# Altium PCB PCB5.pcbdoc
Units mil, origin at the board's own origin, x right, y up, seen from the top; angles counter-clockwise.
Board outline 1301.57 x 1593.8 mil, 2 copper layers (Top Layer, Bottom Layer); 13 components, 7 nets, 64 pads, 11 vias.
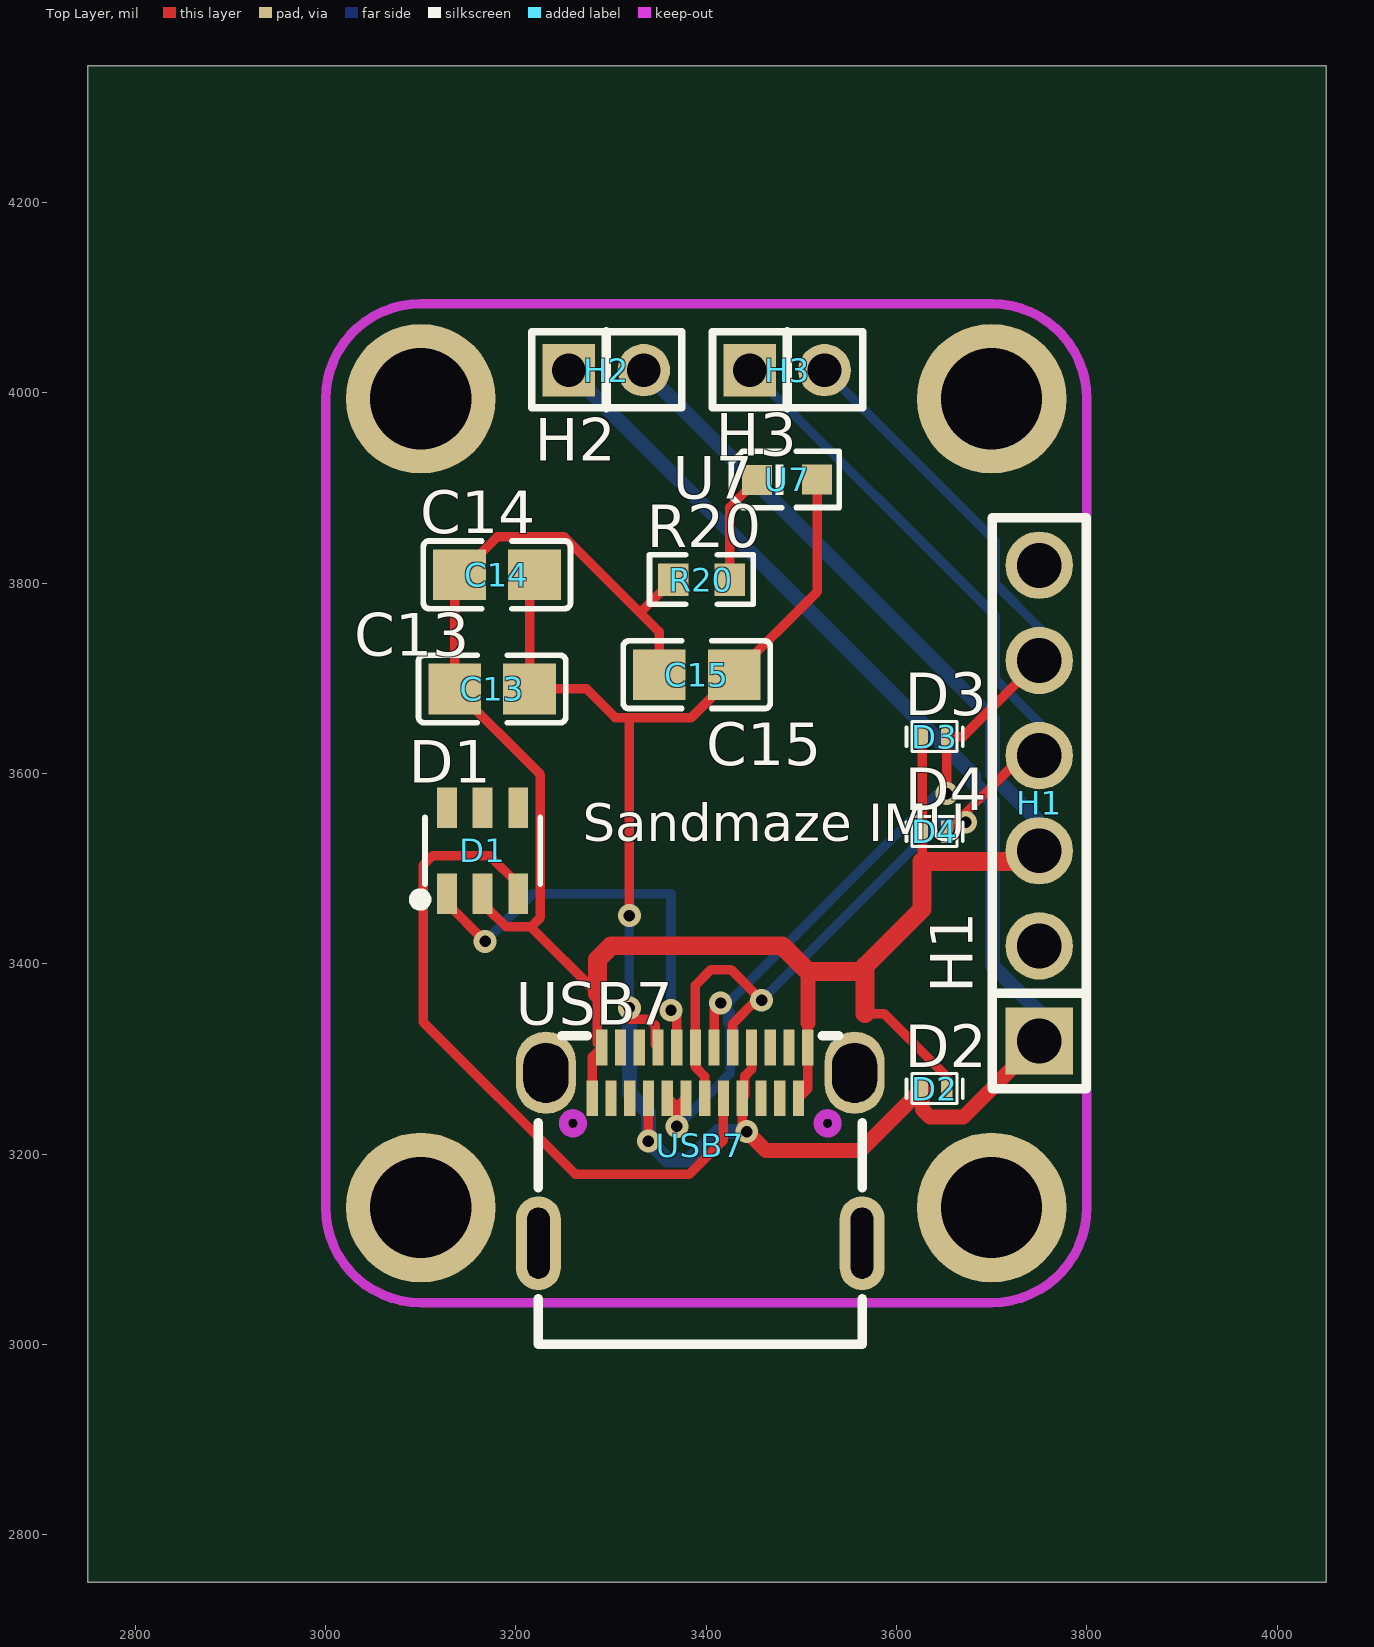
[diagram p0: Top Layer view]
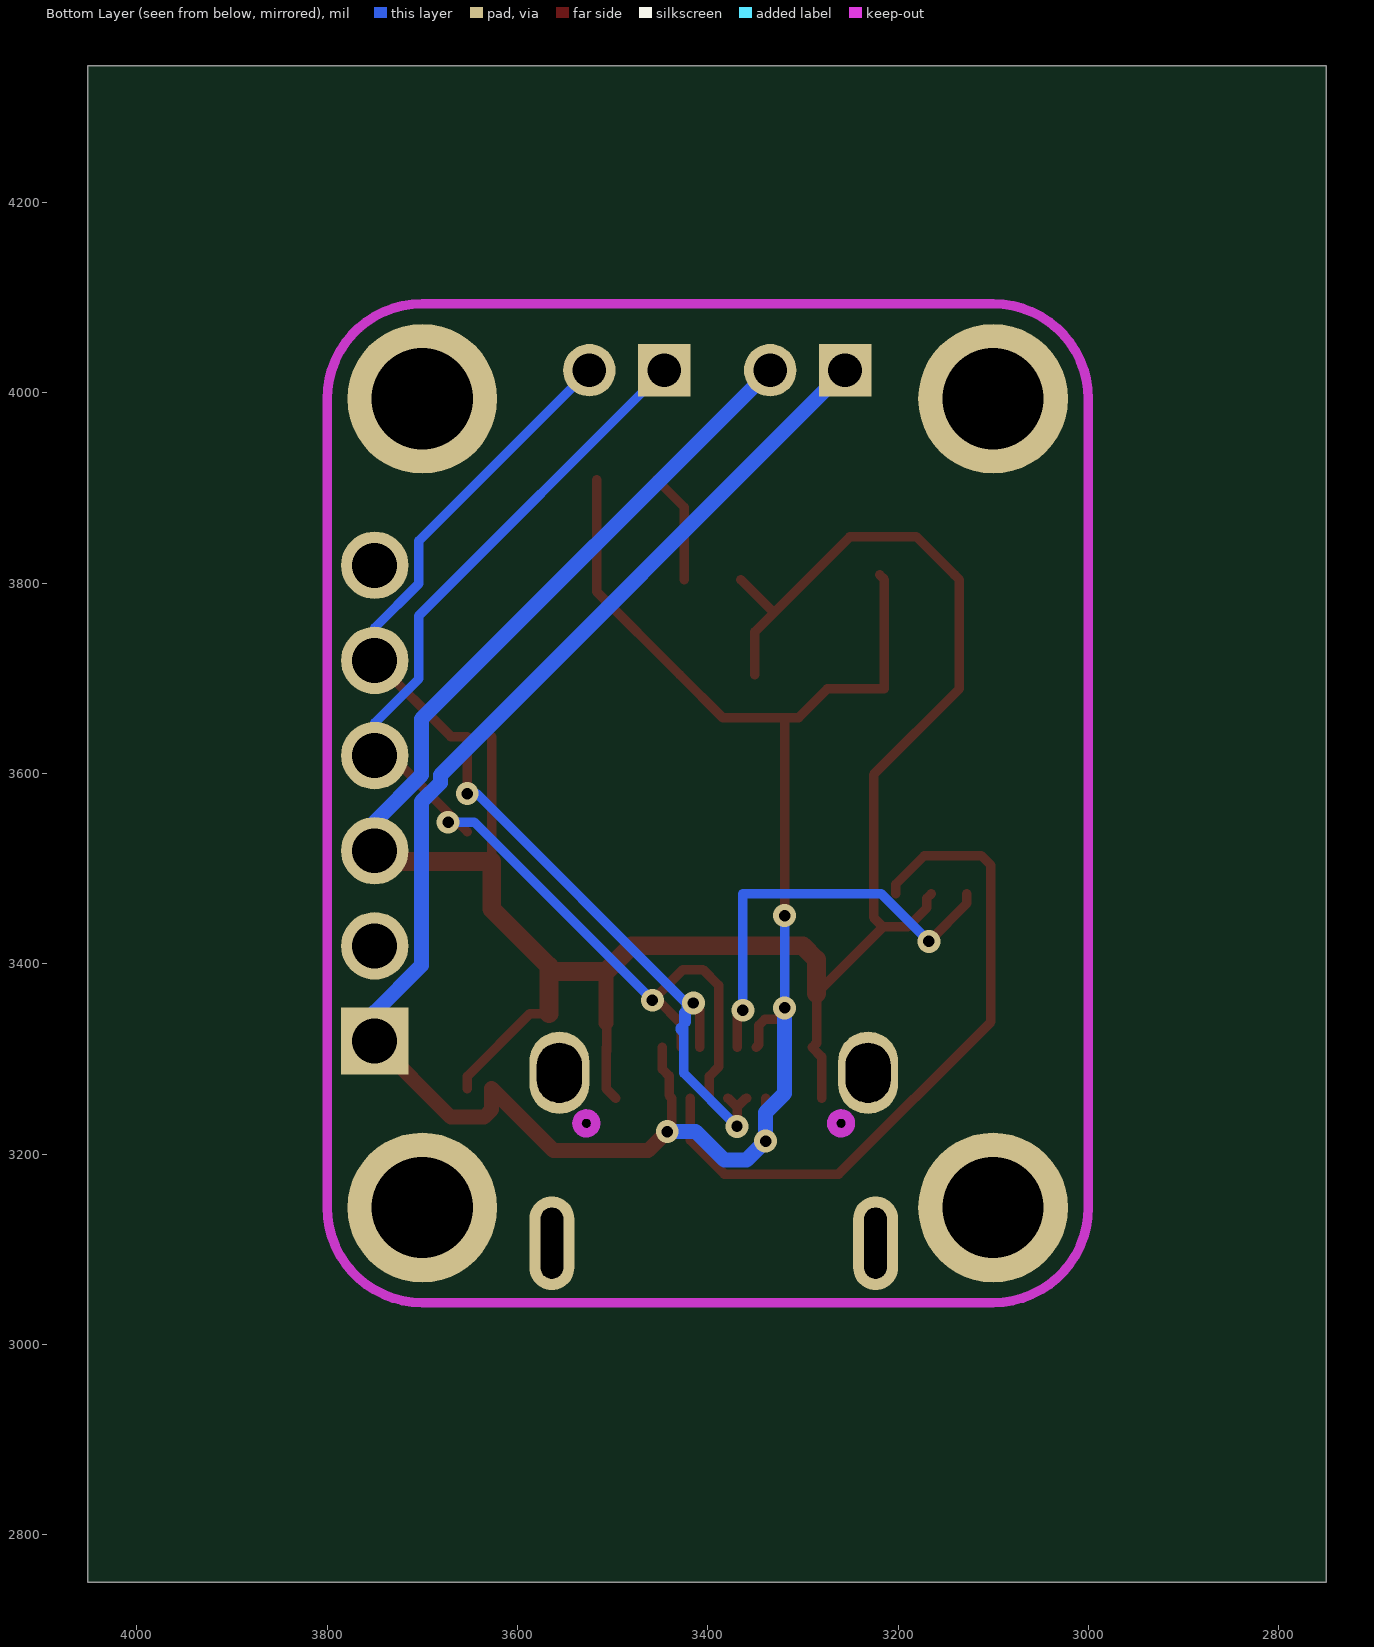
[diagram p1: Bottom Layer view, seen from below]

## Layer stack, top to bottom
Top Layer: signal copper (thickness not stored)
Dielectric: dielectric 12.6, FR-4, Dk 4.8
Bottom Layer: signal copper (thickness not stored)

## Board outline
4051.57,2750 2750,2750 2750,4343.8 4051.57,4343.8

## Design rules (kind name [scope] priority, off if disabled: settings)
BoardOutlineClearance copperThickness1oz [All] p0: genericclearance=10 ignorepadtopadclearanceinfootprint=FALSE except(0: Arc-SplitContinuation Track-SplitContinuation SMDPad-SplitContinuation THPad-SplitContinuation Via-SplitContinuation Fill-SplitContinuation Poly-SplitContinuation Region-SplitContinuation Text-SplitContinuation; 6: Track-CutoutEdge SMDPad-CutoutEdge THPad-CutoutEdge Via-CutoutEdge Region-CutoutEdge; 11.8: Track-OutlineEdge SMDPad-OutlineEdge THPad-OutlineEdge Via-OutlineEdge Fill-OutlineEdge Region-OutlineEdge Poly-OutlineEdge Text-OutlineEdge Fill-CutoutEdge)
BoardOutlineClearance copperThickness2oz [All] p0: genericclearance=10 ignorepadtopadclearanceinfootprint=FALSE except(0: Arc-SplitContinuation Track-SplitContinuation SMDPad-SplitContinuation THPad-SplitContinuation Via-SplitContinuation Fill-SplitContinuation Poly-SplitContinuation Region-SplitContinuation Text-SplitContinuation; 6: Track-CutoutEdge SMDPad-CutoutEdge THPad-CutoutEdge Via-CutoutEdge Region-CutoutEdge; 11.8: Track-OutlineEdge SMDPad-OutlineEdge THPad-OutlineEdge Via-OutlineEdge Fill-OutlineEdge Region-OutlineEdge Poly-OutlineEdge Text-OutlineEdge Fill-CutoutEdge)
Clearance copperThickness1oz [(InNet('+5V') OR InNet('GND') OR InNet('CC1') OR InNet('CC2') OR InNet('IMU_SCL') OR InNet('IMU_SDA') OR InNet('$1N645'))] p1: gap=7 ignorepadtopadclearanceinfootprint=FALSE except(4: Track-Track; 6: Track-SMDPad SMDPad-SMDPad Track-THPad SMDPad-THPad THPad-THPad Track-Via SMDPad-Via THPad-Via Via-Via SMDPad-Fill THPad-Fill Via-Fill Fill-Fill Track-Region SMDPad-Region THPad-Region Via-Region Region-Region Track-Poly SMDPad-Poly THPad-Poly Via-Poly Fill-Poly Region-Poly Poly-Poly Track-Text SMDPad-Text THPad-Text Via-Text Fill-Text Region-Text Poly-Text Text-Text; 6.9: Track-Hole SMDPad-Hole THPad-Hole Via-Hole Fill-Hole Region-Hole Poly-Hole Text-Hole Sheet-Hole; 11.8: Track-Fill Fill-Region Track-Sheet SMDPad-Sheet THPad-Sheet Via-Sheet Fill-Sheet Region-Sheet Poly-Sheet Text-Sheet)
Clearance copperThickness2oz [All] p1: gap=7 ignorepadtopadclearanceinfootprint=FALSE except(6: Track-SMDPad SMDPad-SMDPad Track-THPad SMDPad-THPad THPad-THPad Track-Via SMDPad-Via THPad-Via Via-Via SMDPad-Fill THPad-Fill Via-Fill Fill-Fill Track-Region SMDPad-Region THPad-Region Via-Region Region-Region Track-Poly SMDPad-Poly THPad-Poly Via-Poly Fill-Poly Region-Poly Poly-Poly Track-Text SMDPad-Text THPad-Text Via-Text Fill-Text Region-Text Poly-Text Text-Text; 6.9: Track-Hole SMDPad-Hole THPad-Hole Via-Hole Fill-Hole Region-Hole Poly-Hole Text-Hole Sheet-Hole; 8: Track-Track; 11.8: Track-Fill Fill-Region Track-Sheet SMDPad-Sheet THPad-Sheet Via-Sheet Fill-Sheet Region-Sheet Poly-Sheet Text-Sheet)
DiffPairsRouting differentialPair [All] p1: maxuncoupledlength=10 minlimit=6 maxlimit=6 mostfreqgap=6 toplayer_minwidth=5 toplayer_prefwidth=10 toplayer_maxwidth=100 bottomlayer_minwidth=5 bottomlayer_prefwidth=10 bottomlayer_maxwidth=100
PasteMaskExpansion pasteMaskExpansion [All] p1: expansion=0
PlaneConnect innerPlane [All] p1: planeconnectstyle=Relief reliefexpansion=20 reliefentries=4 reliefconductorwidth=10 reliefairgap=10
PolygonConnect copperRegion [All] p1: connectstyle=Relief reliefentries=4 reliefconductorwidth=10 polygonreliefangle="90 Angle" airgapwidth=10
RoutingVias viaSize [All] p1: viastyle="Through Hole" holewidth=12.0078 minholewidth=11.811 maxholewidth=248.0314 width=24.0158 minwidth=19.685 maxwidth=393.7008
SolderMaskExpansion solderMaskExpansion [All] p1: useseparateexpansions=TRUE expansion=2 expansionbottom=2
Width copperThickness1oz [All] p1: maxlimit=100 minlimit=5 preferedwidth=10
Width copperThickness2oz [All] p1: maxlimit=100 minlimit=8 preferedwidth=10

## Components (designator, comment, footprint, x,y, rotation, side; value= is the part's Value field where it differs from the comment)
C13 "CL21B104KBCNNNC" C0805 3175,3688.8 r0 top
C14 "CL21B104KBCNNNC" C0805 3180,3808.8 r0 top
C15 "CL21B104KBCNNNC" C0805 3390,3703.8 r0 top
D1 "SRV05-4_C558418" SOT-23-6_L2.9-W1.6-P0.95-LS2.8-BL 3165,3518.8 r0 top
D2 "H5VL10B" SOD-882_L1.0-W0.6-BI 3640,3268.8 r0 top
D3 "H5VL10B" SOD-882_L1.0-W0.6-BI 3640,3638.8 r0 top
D4 "H5VL10B" SOD-882_L1.0-W0.6-BI 3640,3538.8 r0 top
H1 "2.54-1x6P直针" HDR-TH_6P-P2.54-V-M-1 3750,3568.8 r90 top
H2 "PZ200V-11-02P" HDR-TH_2P-P2.00-V-M 3295,4023.8 r0 top
H3 "PZ200V-11-02P" HDR-TH_2P-P2.00-V-M 3485,4023.8 r0 top
R20 "RC0603FR-07470RL" R0603 3395,3803.8 r0 top
U7 "PSC-1608U52GC-G4" LED0603-RD_GREEN 3485,3908.8 r0 top
USB7 "TYPEC-324G-BCP24" USB-C-SMD_TYPEC-324G-BCP24 3393.7,3209.16 r0 top locked

## Footprints (in the part's own frame and the unit in brackets; to place one, negate y for a bottom-side part, rotate by r counter-clockwise, add the part's x,y. Pads: shape width x height; smd on the part's side, far side on the other; paste and mask are expansions set on the pad)
C0805 [mm]
  rect 1.41x1.35 smd: 1(-1,0) 2(1,0)
  silkscreen extent -1.96,-0.9 1.96,0.9
HDR-TH_2P-P2.00-V-M [mm]
  rect 1.4x1.4 hole 0.9: 1(-1,0)
  round 1.4 hole 0.9: 2(1,0)
  silkscreen extent -1.99,-1 2.02,1.03
HDR-TH_6P-P2.54-V-M-1 [mm]
  rect 1.8x1.8 hole 1.2: 1(-6.35,0)
  round 1.8 hole 1.2: 2(-3.81,0) 3(-1.27,0) 4(1.27,0) 5(3.81,0) 6(6.35,0)
  silkscreen extent -7.62,-1.25 7.62,1.25
LED0603-RD_GREEN [mm]
  rect 0.8x0.8 smd: 1(-0.799,-0.003) 2(0.799,0.003)
  silkscreen extent -1.49,-0.75 1.39,0.76
R0603 [mil]
  rect 31.75x34.02 smd: 1(-29.66,0) 2(29.66,0)
  silkscreen extent -55,-26 55,26
SOD-882_L1.0-W0.6-BI [mm]
  rect 0.3x0.6 smd: 1(-0.325,0) 2(0.325,0)
  silkscreen extent -0.75,-0.4 0.75,0.4
SOT-23-6_L2.9-W1.6-P0.95-LS2.8-BL [mil]
  rect 20.95x42.2 smd: 1(-37.4,-45.24) 2(0,-45.24) 3(37.4,-45.24) 4(37.4,45.24) 5(0,45.24) 6(-37.4,45.24)
  silkscreen extent -72,-57 61,35
USB-C-SMD_TYPEC-324G-BCP24 [mm]
  oval 1.6x2.2 hole 1.2 slot 1.6 at 90 deg: 1(-4.12,1.937) 2(4.12,1.937)
  oval 1.2x2.5 hole 0.6 slot 1.9 at 90 deg: 3(-4.32,-2.613) 4(4.32,-2.613)
  rect 0.3x0.95 smd: A1(-2.63,2.613) A2(-2.13,2.613) A3(-1.63,2.613) A4(-1.13,2.613) A5(-0.63,2.613) A6(-0.13,2.613) A7(0.37,2.613) A8(0.87,2.613) A9(1.37,2.613) A10(1.87,2.613) A11(2.37,2.613) A12(2.87,2.613) B1(2.62,1.262) B2(2.12,1.262) B3(1.62,1.262) B4(1.12,1.262) B5(0.62,1.262) B6(0.12,1.262) B7(-0.38,1.262) B8(-0.88,1.262) B9(-1.38,1.262) B10(-1.88,1.262) B11(-2.38,1.262) B12(-2.88,1.262)
  Board Outline Layer circle w0.005: c3.4,0.587 r0.25
  Board Outline Layer circle w0.005: c-3.4,0.587 r0.25
  Board Outline Layer circle w0.254: c3.4,0.587 r0.25
  Board Outline Layer circle w0.254: c-3.4,0.587 r0.25
  Multi-Layer board cut-out: 3.65,0.587 3.615,0.711 3.524,0.801 3.4,0.834 3.276,0.801 3.185,0.711 3.15,0.587 3.15,0.587 3.185,0.464 3.276,0.374 3.4,0.341 3.524,0.374 3.615,0.464 3.65,0.587
  Multi-Layer board cut-out: -3.15,0.587 -3.185,0.711 -3.276,0.801 -3.4,0.834 -3.524,0.801 -3.615,0.711 -3.65,0.587 -3.65,0.587 -3.615,0.464 -3.524,0.374 -3.4,0.341 -3.276,0.374 -3.185,0.464 -3.15,0.587
  silkscreen extent -4.32,-5.31 4.32,2.92

## Free pads (board coordinates)
  round 157.48 hole 106.3 unplated: 1(3100,3143.8) 1(3100,3993.8) 1(3700,3143.8) 1(3700,3993.8)

## Via types
v1: diameter 24.02, hole 12.01, Top Layer to Bottom Layer, 11 vias

## Nets (pads, with @x,y where several pads share a name; then routed paths per layer and width w, separated by ;. In a path a pad name is that pad's centre, name@x,y a point inside that pad or via, vN(x,y) a via of type N, cw(c..) or ccw(c..) an arc to the next point about the centre after c; other vN are vias at no path point)
$1N645: R20.2 U7.1 | length 116.8
  Top Layer w10: R20.2 3424.66,3879.8 U7.1
+5V: C13.2 C14.2 C15.2 D2.1 H1.1 H2.1 U7.2 USB7.A4 USB7.A9 USB7.B4 USB7.B9 | length 2703.7
  Top Layer w10: C14.2 3214.37,3803.8 C13.2 3274.37,3688.8 3304.37,3658.8 3320,3658.8 ; v1(3319.22,3353.65) 3319.22,3342.01 3319.54,3341.7 3339.99,3341.7 3346.42,3335.26 3346.42,3314.81 USB7.A4 ; v1(3319.22,3450.57) 3319.22,3658.02 3320,3658.8 ; v1(3339.22,3213.65) USB7.B9@3339.22,3258.71 ; v1(3442.59,3223.65) 3437.8,3228.45 USB7.B4 3440.59,3261.65 3440.59,3282.11 3447.64,3289.16 USB7.A9 ; U7.2 3516.47,3790.91 C15.2 3384.37,3658.8 3320,3658.8
  Top Layer w15.75: v1(3442.59,3223.65) 3462.59,3203.65 3562.06,3203.65 D2.1 3627.2,3246.6 3635,3238.8 3670,3238.8 H1.1
  Bottom Layer w10: v1(3319.22,3353.65) v1(3319.22,3450.57)
  Bottom Layer w15.75: H2.1 3680.95,3598.49 3680.95,3590.2 3700.71,3570.43 3700.71,3398.38 3750,3349.09 H1.1 ; v1(3319.22,3353.65) 3319.22,3263.65 3339.22,3243.65 v1(3339.22,3213.65) 3359.22,3193.65 3382.59,3193.65 3412.59,3223.65 v1(3442.59,3223.65)
CC1: D1.1 USB7.A5 | length 447
  Top Layer w10: D1.1 3127.6,3463.56 v1(3167.6,3423.56) ; v1(3362.98,3351.22) 3368.9,3345.3 USB7.A5
  Bottom Layer w10: v1(3167.6,3423.56) 3217.84,3473.8 3362.98,3473.8 v1(3362.98,3351.22)
CC2: D1.3 USB7.B5 | length 732.3
  Top Layer w10: D1.3 3202.4,3483.56 3172.4,3513.56 3112.4,3513.56 3102.4,3503.56 3102.4,3338.86 3262.4,3178.86 3382.4,3178.86 3418.11,3214.57 USB7.B5
GND: C13.1 C14.1 C15.1 D1.2 D2.2 D3.1 D4.1 H1.3 H2.2 R20.1 USB7.A1 USB7.A12 USB7.B1 USB7.B12 | length 2787.4
  Top Layer w10: D1.2 3169.76,3468.8 3169.76,3458.8 3189.76,3438.8 3215.63,3438.8 ; USB7.B12 3280.32,3302.17 USB7.A1 3285.63,3316.54 3285.63,3368.8 3215.63,3438.8 ; 3330.63,3769.09 R20.1 ; C15.1 3350.63,3748.8 3250.63,3848.8 3180.63,3848.8 C14.1 3135.63,3803.8 C13.1 3225.63,3598.8 3225.63,3448.8 3215.63,3438.8 ; USB7.B1 3506.85,3268.86 USB7.A12@3506.85,3307.58 ; USB7.A12 USB7.A12@3506.85,3307.58 ; 3506.85,3337.58 3506.25,3337.58 3506.25,3308.18 USB7.A12@3506.85,3307.58 ; 3566.85,3347.58 3586.85,3347.58 3652.8,3281.64 D2.2 ; 3626.85,3507.58 3626.85,3538.45 D4.1 D3.1
  Top Layer w15.75: 3506.85,3337.58 3506.85,3391.95
  Top Layer w19.68: 3285.63,3368.8 3285.63,3404.43 3300,3418.8 3480,3418.8 3506.85,3391.95 3561.22,3391.95 3566.85,3397.58 ; 3566.85,3347.58 3566.85,3397.58 ; H1.3 3738.78,3507.58 3626.85,3507.58 3626.85,3457.58 3566.85,3397.58
  Bottom Layer w15.75: H2.2 3700.71,3657.46 3700.71,3598.38 3750,3549.09 H1.3
IMU_SCL: D3.2 H1.5 H3.2 USB7.A7 USB7.B7 USB7.B8 | length 1199.6
  Top Layer w10: USB7.B8 3359.7,3258.86 3369.22,3249.34 ; v1(3369.22,3229.07) 3369.22,3249.34 ; USB7.B7 3369.22,3249.34 ; USB7.A7 3408.27,3352.01 v1(3415.06,3358.8) ; v1(3652.8,3578.8) D3.2 3670,3638.8 H1.5
  Bottom Layer w10: v1(3369.22,3229.07) 3425.06,3284.91 3425.06,3328.8 ; v1(3415.06,3358.8) v1@3422.8,3351.07 ; H3.2 3703.58,3844.59 3703.58,3799.57 3750,3753.16 H1.5 ; v1(3652.8,3578.8) 3642.8,3578.8 3422.8,3358.8 v1@3422.8,3351.07 ; v1@3422.8,3351.07 3422.8,3338.8 3425.06,3336.53 ; v1@3422.8,3351.07 3425.06,3348.8 3425.06,3336.53 ; 3425.06,3328.8 3426.99,3328.8 3428.93,3330.73 3428.93,3332.67 3425.06,3336.53 ; 3425.06,3328.8 3425.06,3336.53
IMU_SDA: D4.2 H1.4 H3.1 USB7.A6 USB7.A8 USB7.B6 | length 1241.4
  Top Layer w10: USB7.B6 3398.43,3281.71 3388.59,3291.55 USB7.A6 3388.59,3377.39 3405,3393.8 3426,3393.8 v1(3458.16,3361.65) 3452.43,3361.65 3427.96,3337.18 USB7.A8 ; D4.2 v1@3662.8,3548.8 ; v1(3672.8,3548.8) v1@3662.8,3548.8 ; H1.4 3732.8,3618.8 v1@3662.8,3548.8
  Bottom Layer w10: H3.1 3703.58,3765.85 3703.58,3699.57 3750,3653.16 H1.4 ; v1(3458.16,3361.65) 3645.31,3548.8 v1(3672.8,3548.8)
pads on no net: D1.4 D1.5 D1.6 H1.2 H1.6 USB7.1 USB7.2 USB7.3 USB7.4 USB7.A2 USB7.A3 USB7.A10 USB7.A11 USB7.B2 USB7.B3 USB7.B10 USB7.B11

## Keep-outs
Board Outline Layer:
  lines w10: 3000,3143.8 ccw(c3100,3143.8) 3100,3043.8 3700,3043.8 ccw(c3700,3143.8) 3800,3143.8 3800,3993.8 ccw(c3700,3993.8) 3700,4093.8 3100,4093.8 ccw(c3100,3993.8) 3000,3993.8 3000,3143.8

## Silkscreen, mask and mechanical layers (free items; w line width, h text height)
Top Silkscreen Layer:
  text "Sandmaze IMU" at 3270,3528.8 h39.37